# Altium PCB 11pFPC.PcbDoc
Units mm, origin at the board's own origin, x right, y up, seen from the top; angles counter-clockwise.
Board outline 50 x 4.3 mm, 2 copper layers (Top Layer, Bottom Layer), stack 0.465 mm thick; 2 components, 0 nets, 22 pads, 0 vias.
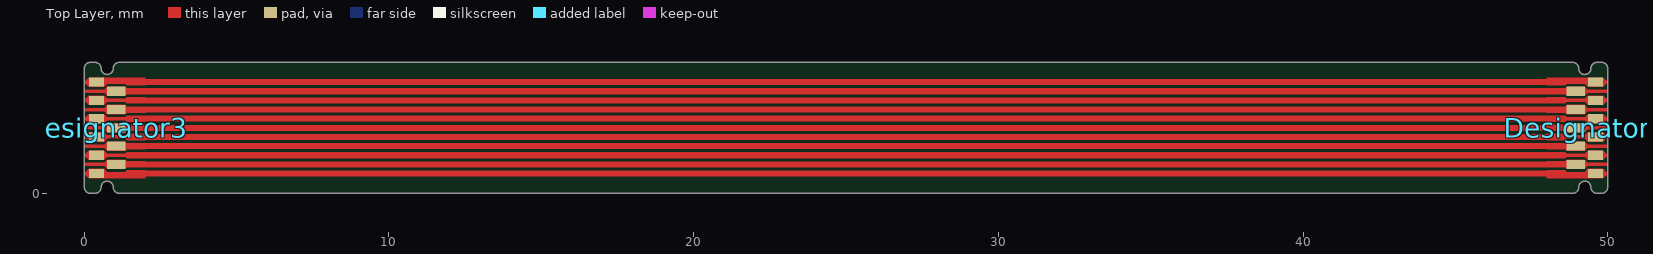
[diagram p0: Top Layer view]
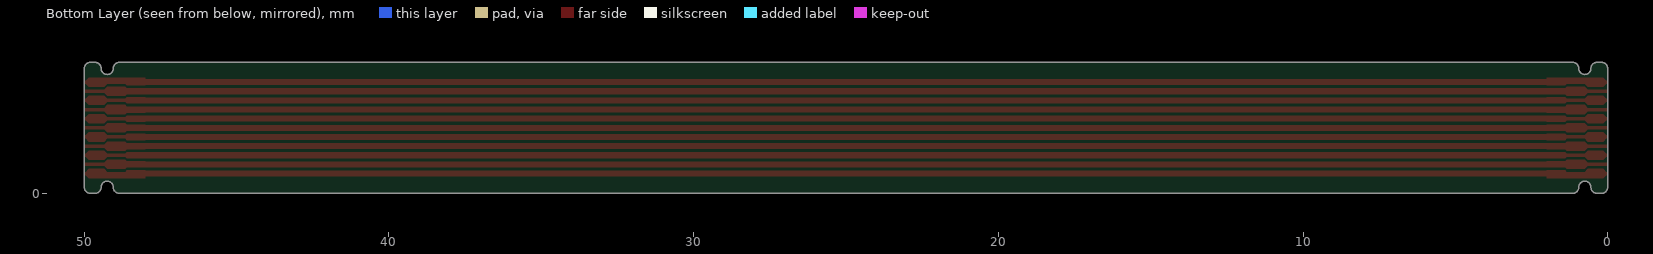
[diagram p1: Bottom Layer view, seen from below]

## Layer stack, top to bottom
Stiffener 1: core 0.15, Core-009, Dk 4.5
Board Layer Stack Top Coverlay: solder mask 0.0125, FC-001, Dk 4
Adhesive 3: prepreg 0.015, PP-006, Dk 4.1
Top Layer: signal copper 0.035
Adhesive 1: prepreg 0.02, PP-006, Dk 4.1
Dielectric 1: core 0.025, Core-043, Dk 4.3
Adhesive 2: prepreg 0.02, PP-006, Dk 4.1
Bottom Layer: signal copper 0.035
Adhesive 4: prepreg 0.015, PP-006, Dk 4.1
Board Layer Stack Bottom Coverlay: solder mask 0.0125, FC-001, Dk 4
Stiffener 2: core 0.15, Core-009, Dk 4.5

## Board outline
48,0 48.85,0 ccw(c48.85,0.2) 49.05,0.2 cw(c49.25,0.2) 49.25,0.4 cw(c49.25,0.2) 49.45,0.2 ccw(c49.65,0.2) 49.65,0 49.8,0 ccw(c49.8,0.2) 50,0.2 50,4.1 ccw(c49.8,4.1) 49.8,4.3 49.65,4.3 ccw(c49.65,4.1) 49.45,4.1 cw(c49.25,4.1) 49.25,3.9 cw(c49.25,4.1) 49.05,4.1 ccw(c48.85,4.1) 48.85,4.3 48,4.3 47,4.3 3,4.3 1.15,4.3 ccw(c1.15,4.1) 0.95,4.1 cw(c0.75,4.1) 0.75,3.9 cw(c0.75,4.1) 0.55,4.1 ccw(c0.35,4.1) 0.35,4.3 0.2,4.3 ccw(c0.2,4.1) 0,4.1 0,0.2 ccw(c0.2,0.2) 0.2,0 0.35,0 ccw(c0.35,0.2) 0.55,0.2 cw(c0.75,0.2) 0.75,0.4 cw(c0.75,0.2) 0.95,0.2 ccw(c1.15,0.2) 1.15,0 2,0 47,0
board region "Layer Stack Region 1": 47,0 48,0 48,4.3 47,4.3
board region "Layer Stack Region 3": 2,0 3,0 3,4.3 2,4.3
board region "Default Layer Stack Region": 3,0 47,0 47,4.3 3,4.3
board region "Layer Stack Region 5": 1.15,0 2,0 2,4.3 1.15,4.3 1.11,4.3 1.037,4.27 0.98,4.213 0.95,4.14 0.95,4.1 0.946,4.061 0.916,3.989 0.861,3.934 0.789,3.904 0.75,3.9 0.711,3.904 0.639,3.934 0.584,3.989 0.554,4.061 0.55,4.1 0.55,4.14 0.52,4.213 0.463,4.27 0.39,4.3 0.35,4.3 0.2,4.3 0.16,4.3 0.087,4.27 0.03,4.213 0,4.14 0,4.1 0,0.2 0,0.16 0.03,0.087 0.087,0.03 0.16,0 0.2,0 0.35,0 0.39,0 0.463,0.03 0.52,0.087 0.55,0.16 0.55,0.2 0.554,0.239 0.584,0.311 0.639,0.366 0.711,0.396 0.75,0.4 0.789,0.396 0.861,0.366 0.916,0.311 0.946,0.239 0.95,0.2 0.95,0.16 0.98,0.087 1.037,0.03 1.11,0
board region "Layer Stack Region 4": 50,0.2 50,4.1 50,4.14 49.97,4.213 49.913,4.27 49.84,4.3 49.8,4.3 49.65,4.3 49.61,4.3 49.537,4.27 49.48,4.213 49.45,4.14 49.45,4.1 49.446,4.061 49.416,3.989 49.361,3.934 49.289,3.904 49.25,3.9 49.211,3.904 49.139,3.934 49.084,3.989 49.054,4.061 49.05,4.1 49.05,4.14 49.02,4.213 48.963,4.27 48.89,4.3 48.85,4.3 48,4.3 48,0 48.85,0 48.89,0 48.963,0.03 49.02,0.087 49.05,0.16 49.05,0.2 49.054,0.239 49.084,0.311 49.139,0.366 49.211,0.396 49.25,0.4 49.289,0.396 49.361,0.366 49.416,0.311 49.446,0.239 49.45,0.2 49.45,0.16 49.48,0.087 49.537,0.03 49.61,0 49.65,0 49.8,0 49.84,0 49.913,0.03 49.97,0.087 50,0.16

## Design rules (kind name [scope] priority, off if disabled: settings)
Clearance [All] p1: gap=0.254 ignorepadtopadclearanceinfootprint=FALSE except(0: Arc-Hole Track-Hole SMDPad-Hole THPad-Hole Via-Hole Fill-Hole Poly-Hole Region-Hole Text-Hole; 0.1: Arc-Arc Arc-Track Arc-SMDPad Arc-THPad Arc-Via Arc-Fill Arc-Poly Arc-Region Arc-Text Track-Track Track-SMDPad Track-THPad Track-Via Track-Fill Track-Poly Track-Region Track-Text)
PolygonConnect [All] p1: connectstyle=Relief reliefconductorwidth=0.254 reliefentries=4 polygonreliefangle="90 Angle" airgapwidth=0.254
RoutingVias [All] p1: holewidth=0.711 width=1.27 viastyle="Through Hole" minholewidth=0.711 minwidth=1.27 maxholewidth=0.711 maxwidth=1.27
SolderMaskExpansion [All] p1: expansion=0.102 istentingtop=FALSE
Width Width_1 [All] p1: maxlimit=0.3 minlimit=0.1 preferedwidth=0.2 substack1={AB4A8F5B-682E-429B-893A-58FF3867A511} substack2={B9896107-CAB2-4089-A428-B9908DC45F2B} substack3={B7E83FFE-D746-4C60-BF62-21D3ECD07952}
Width [All] p2: maxlimit=0.3 minlimit=0.1 preferedwidth=0.2 substack1={AB4A8F5B-682E-429B-893A-58FF3867A511} toplayer_{ab4a8f5b-682e-429b-893a-58ff3867a511}_minwidth=0.254 toplayer_{ab4a8f5b-682e-429b-893a-58ff3867a511}_maxwidth=0.254 toplayer_{ab4a8f5b-682e-429b-893a-58ff3867a511}_prefwidth=0.254 bottomlayer_{ab4a8f5b-682e-429b-893a-58ff3867a511}_minwidth=0.254 bottomlayer_{ab4a8f5b-682e-429b-893a-58ff3867a511}_maxwidth=0.254 bottomlayer_{ab4a8f5b-682e-429b-893a-58ff3867a511}_prefwidth=0.254 substack2={B9896107-CAB2-4089-A428-B9908DC45F2B} toplayer_{b9896107-cab2-4089-a428-b9908dc45f2b}_minwidth=0.254 toplayer_{b9896107-cab2-4089-a428-b9908dc45f2b}_maxwidth=0.254 toplayer_{b9896107-cab2-4089-a428-b9908dc45f2b}_prefwidth=0.254 bottomlayer_{b9896107-cab2-4089-a428-b9908dc45f2b}_minwidth=0.254 bottomlayer_{b9896107-cab2-4089-a428-b9908dc45f2b}_maxwidth=0.254 bottomlayer_{b9896107-cab2-4089-a428-b9908dc45f2b}_prefwidth=0.254 substack3={B7E83FFE-D746-4C60-BF62-21D3ECD07952} toplayer_{b7e83ffe-d746-4c60-bf62-21d3ecd07952}_minwidth=0.254 toplayer_{b7e83ffe-d746-4c60-bf62-21d3ecd07952}_maxwidth=0.254 toplayer_{b7e83ffe-d746-4c60-bf62-21d3ecd07952}_prefwidth=0.254 bottomlayer_{b7e83ffe-d746-4c60-bf62-21d3ecd07952}_minwidth=0.254 bottomlayer_{b7e83ffe-d746-4c60-bf62-21d3ecd07952}_maxwidth=0.254 bottomlayer_{b7e83ffe-d746-4c60-bf62-21d3ecd07952}_prefwidth=0.254
30 further rules are at their usual default settings.

## Components (designator, comment, footprint, x,y, rotation, side; value= is the part's Value field where it differs from the comment)
Designator3 "Comment" FPC03X11 0,0 r90 top locked
Designator4 "Comment" FPC03X11 50,4.3 r270 top

## Footprints (in the part's own frame and the unit in brackets; to place one, negate y for a bottom-side part, rotate by r counter-clockwise, add the part's x,y. Pads: shape width x height; smd on the part's side, far side on the other; paste and mask are expansions set on the pad)
FPC03X11 [mm]
  rect 0.3x0.5 smd paste-2539.97: P1(0.65,-0.4) P3(1.25,-0.4) P5(1.85,-0.4) P7(2.45,-0.4) P9(3.05,-0.4) P11(3.65,-0.4)
  rect 0.3x0.6 smd paste-2539.97: P2(0.95,-1.05) P4(1.55,-1.05) P6(2.15,-1.05) P8(2.75,-1.05) P10(3.35,-1.05)
  Top Layer region: 3.5,-0.15 3.6,-0.05 3.6,0 3.7,0 3.7,-0.05 3.8,-0.15 3.8,-2 3.55,-2 3.55,-1.4 3.6,-1.35 3.6,-0.75 3.5,-0.65
  Top Layer region: 3.2,-0.75 3.3,-0.65 3.3,0 3.4,0 3.4,-0.65 3.5,-0.75 3.5,-1.35 3.45,-1.4 3.45,-2 3.25,-2 3.25,-1.4 3.2,-1.35
  Top Layer region: 2.9,-0.15 3,-0.05 3,0 3.1,0 3.1,-0.05 3.2,-0.15 3.2,-0.65 3.1,-0.75 3.1,-1.35 3.15,-1.4 3.15,-2 2.95,-2 2.95,-1.4 3,-1.35 3,-0.75 2.9,-0.65
  Top Layer region: 2.6,-0.75 2.7,-0.65 2.7,0 2.8,0 2.8,-0.65 2.9,-0.75 2.9,-1.35 2.85,-1.4 2.85,-2 2.65,-2 2.65,-1.4 2.6,-1.35
  Top Layer region: 2.3,-0.15 2.4,-0.05 2.4,0 2.5,0 2.5,-0.05 2.6,-0.15 2.6,-0.65 2.5,-0.75 2.5,-1.35 2.55,-1.4 2.55,-2 2.35,-2 2.35,-1.4 2.4,-1.35 2.4,-0.75 2.3,-0.65
  Top Layer region: 2,-0.75 2.1,-0.65 2.1,0 2.2,0 2.2,-0.65 2.3,-0.75 2.3,-1.35 2.25,-1.4 2.25,-2 2.05,-2 2.05,-1.4 2,-1.35
  Top Layer region: 1.7,-0.15 1.8,-0.05 1.8,0 1.9,0 1.9,-0.05 2,-0.15 2,-0.65 1.9,-0.75 1.9,-1.35 1.95,-1.4 1.95,-2 1.75,-2 1.75,-1.4 1.8,-1.35 1.8,-0.75 1.7,-0.65
  Top Layer region: 1.4,-0.75 1.5,-0.65 1.5,0 1.6,0 1.6,-0.65 1.7,-0.75 1.7,-1.35 1.65,-1.4 1.65,-2 1.45,-2 1.45,-1.4 1.4,-1.35
  Top Layer region: 1.1,-0.15 1.2,-0.05 1.2,0 1.3,0 1.3,-0.05 1.4,-0.15 1.4,-0.65 1.3,-0.75 1.3,-1.35 1.35,-1.4 1.35,-2 1.15,-2 1.15,-1.4 1.2,-1.35 1.2,-0.75 1.1,-0.65
  Top Layer region: 0.8,-0.75 0.9,-0.65 0.9,0 1,0 1,-0.65 1.1,-0.75 1.1,-1.35 1.05,-1.4 1.05,-2 0.85,-2 0.85,-1.4 0.8,-1.35
  Top Layer region: 0.5,-0.15 0.6,-0.05 0.6,0 0.7,0 0.7,-0.05 0.8,-0.15 0.8,-0.65 0.7,-0.75 0.7,-1.35 0.75,-1.4 0.75,-2 0.5,-2

## Nets (pads, with @x,y where several pads share a name; then routed paths per layer and width w, separated by ;. In a path a pad name is that pad's centre, name@x,y a point inside that pad or via, vN(x,y) a via of type N, cw(c..) or ccw(c..) an arc to the next point about the centre after c; other vN are vias at no path point)
pads on no net: Designator3.P1 Designator3.P2 Designator3.P3 Designator3.P4 Designator3.P5 Designator3.P6 Designator3.P7 Designator3.P8 Designator3.P9 Designator3.P10 Designator3.P11 Designator4.P1 Designator4.P2 Designator4.P3 Designator4.P4 Designator4.P5 Designator4.P6 Designator4.P7 Designator4.P8 Designator4.P9 Designator4.P10 Designator4.P11
copper on no net: | length 516.1
  Top Layer w0.1: 0.4,3.65 1.65,3.65
  Top Layer w0.2: 1.05,3.35 2,3.35 2.35,3.35 47.65,3.35 48.4,3.35 ; 1.5,1.25 2,1.25 2.35,1.25 47.65,1.25 48.4,1.25 ; 1.6,0.65 2,0.65 2.35,0.65 47.65,0.65 48.4,0.65 ; 1.65,0.95 2,0.95 2.35,0.95 47.65,0.95 48.4,0.95 ; 1.65,3.05 2,3.05 2.35,3.05 47.65,3.05 48.4,3.05 ; 1.65,3.65 2,3.65 2.35,3.65 47.65,3.65 48.4,3.65 ; 1.7,1.55 2,1.55 2.35,1.55 47.65,1.55 48.4,1.55 ; 1.7,1.85 2,1.85 2.35,1.85 47.65,1.85 48.4,1.85 ; 1.7,2.15 2,2.15 2.35,2.15 47.65,2.15 48.4,2.15 ; 1.7,2.45 2,2.45 2.35,2.45 47.65,2.45 48.4,2.45 ; 1.7,2.75 2,2.75 2.35,2.75 47.65,2.75 48.4,2.75

## Polygon pours and split planes (outlines as drawn)
no net on Layer0 "Default Coverlay 4 Top" (split plane): 47,0 48,0 48,4.3 47,4.3
no net on Layer0 "Default Coverlay 4 Top" (split plane): 3,0 2,0 2,4.3 3,4.3
no net on Layer0 "Default Coverlay 4 Bottom" (split plane): 47,0 48,0 48,4.3 47,4.3
no net on Layer0 "Default Coverlay 4 Bottom" (split plane): 3,0 2,0 2,4.3 3,4.3
no net on Layer0 "Default Coverlay 2 Top" (split plane): 3,0 47,0 47,4.3 3,4.3
no net on Layer0 "Default Coverlay 2 Bottom" (split plane): 3,0 47,0 47,4.3 3,4.3

## Silkscreen, mask and mechanical layers (free items; w line width, h text height)
Top Overlay:
  text "Bottom stiffner  / 0.1mm" at -0.5,-6.8 h0.6
  text "Bottom stiffner  / 0.1mm" at 42.303,-6.8 h0.6
Mechanical 1:
  lines w0.01: 3,0 3,4.3 ; 47,0 47,4.3 ; 2,0 48,0 ; 2,0 1.15,0 cw(c1.15,0.2) 0.95,0.2 ccw(c0.75,0.2) 0.75,0.4 ccw(c0.75,0.2) 0.55,0.2 cw(c0.35,0.2) 0.35,0 0.2,0 cw(c0.2,0.2) 0,0.2 0,4.1 cw(c0.2,4.1) 0.2,4.3 0.35,4.3 cw(c0.35,4.1) 0.55,4.1 ccw(c0.75,4.1) 0.75,3.9 ccw(c0.75,4.1) 0.95,4.1 cw(c1.15,4.1) 1.15,4.3 2,4.3 ; 2,0 2,4.3 ; 2,4.3 48,4.3 ; 48,0 48.85,0 ccw(c48.85,0.2) 49.05,0.2 cw(c49.25,0.2) 49.25,0.4 cw(c49.25,0.2) 49.45,0.2 ccw(c49.65,0.2) 49.65,0 49.8,0 ccw(c49.8,0.2) 50,0.2 50,4.1 ccw(c49.8,4.1) 49.8,4.3 49.65,4.3 ccw(c49.65,4.1) 49.45,4.1 cw(c49.25,4.1) 49.25,3.9 cw(c49.25,4.1) 49.05,4.1 ccw(c48.85,4.1) 48.85,4.3 48,4.3 ; 48,0 48,4.3

## Dimensions
0,0 to 3,0 on Top Overlay
50,0 to 47,0 on Top Overlay